# Altium PCB Pioneer.PcbDoc
Units mil, origin at the board's own origin, x right, y up, seen from the top; angles counter-clockwise.
Board outline 3000 x 2490 mil, 2 copper layers (Top Layer, Bottom Layer); 15 components, 21 nets, 99 pads, 2 vias.
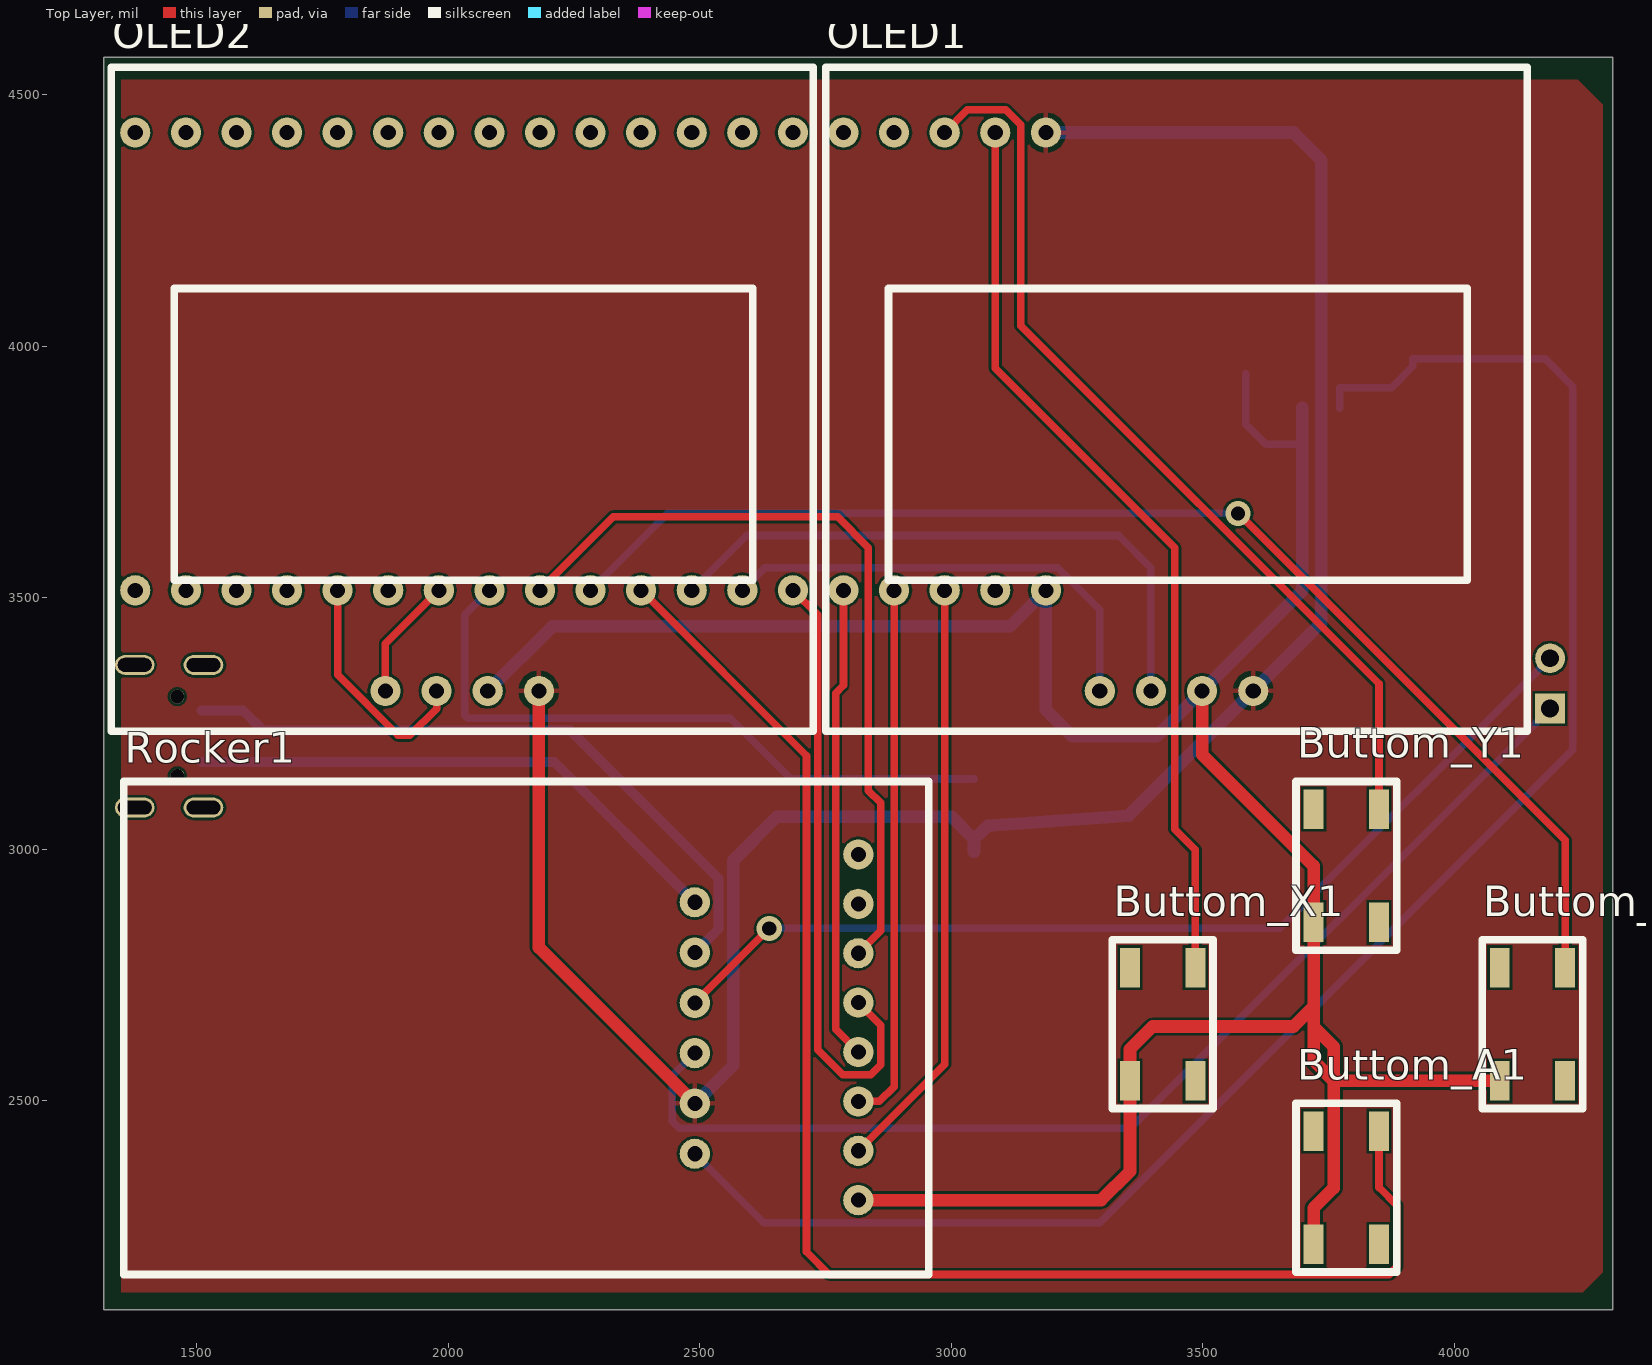
[diagram p0: Top Layer view]
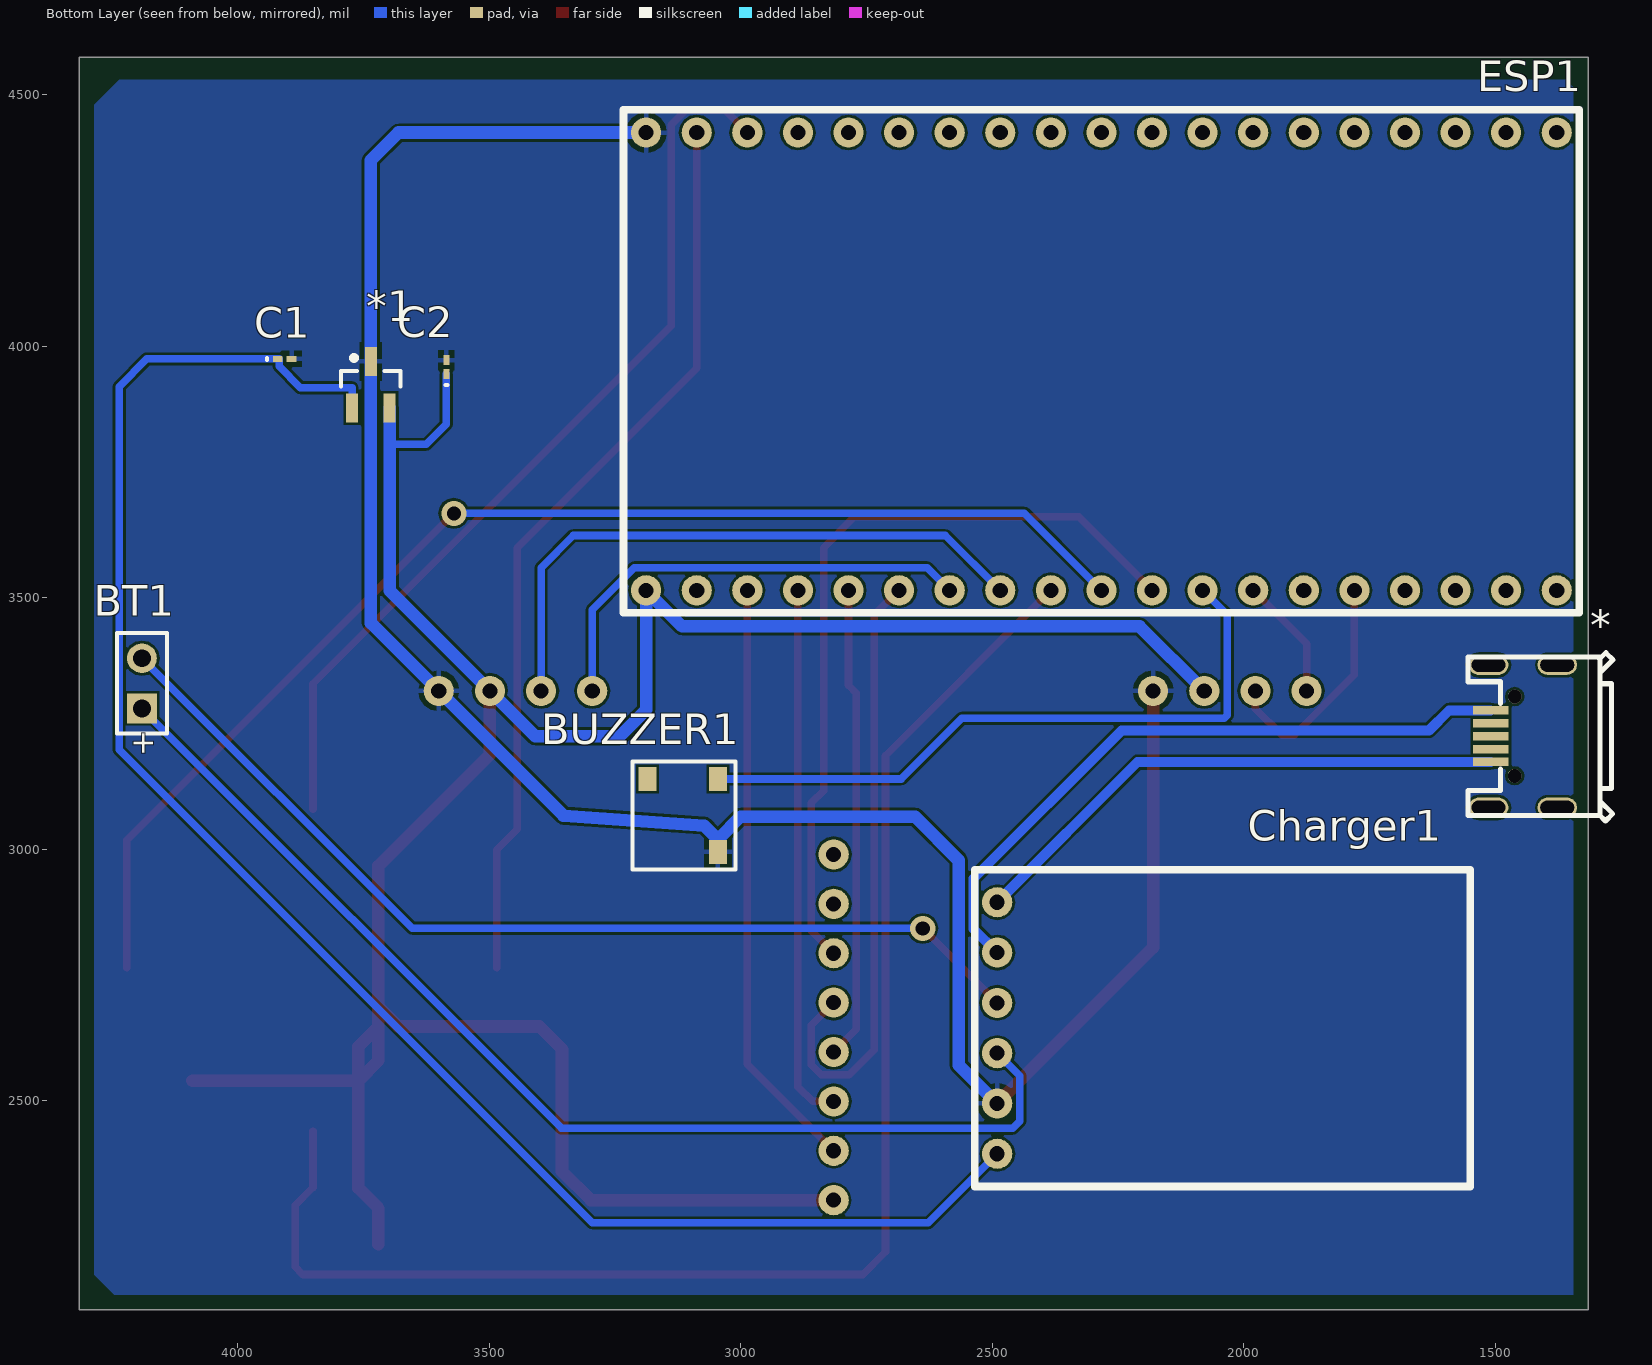
[diagram p1: Bottom Layer view, seen from below]

## Layer stack, top to bottom
Top Solder: solder mask 0.4, Solder Resist, Dk 3.5
Top Layer: signal copper 1.4
Dielectric 1: dielectric 12.6, FR-4, Dk 4.8
Bottom Layer: signal copper 1.4
Bottom Solder: solder mask 0.4, Solder Resist, Dk 3.5

## Board outline
1315,2085 4315,2085 4315,2145 4315,4575 1315,4575

## Design rules (kind name [scope] priority, off if disabled: settings)
Clearance [All] p1: gap=5 ignorepadtopadclearanceinfootprint=FALSE
PolygonConnect [All] p1: connectstyle=Relief reliefconductorwidth=10 reliefentries=4 polygonreliefangle="90 Angle" airgapwidth=10
RoutingVias [All] p1: holewidth=28 width=50 viastyle="Through Hole" minholewidth=28 minwidth=50 maxholewidth=28 maxwidth=50
SolderMaskExpansion [All] p1: expansion=4
Width "VCC IN" [InNet('VCC microusb')] p1: maxlimit=25 minlimit=15 preferedwidth=20
Width "GND IN" [InNet('GND microusb')] p2: maxlimit=25 minlimit=15 preferedwidth=20
Width VCC [InNet('VCC')] p3: maxlimit=30 minlimit=15 preferedwidth=25
Width GND [InNet('GND')] p4: maxlimit=30 minlimit=15 preferedwidth=25
Width [All] p5: maxlimit=20 minlimit=12 preferedwidth=15
30 further rules are at their usual default settings.

## Components (designator, comment, footprint, x,y, rotation, side; value= is the part's Value field where it differs from the comment)
* "Micro_usb" Micro_usb 1395,3220 r180 bottom
*1 "DC3.3" SOT23_M 3735,3923.74 r90 bottom
BT1 "Battery" BAT-2 4190,3330 r90 bottom
Buttom_A1 "Buttom" Buttom 3760,2425 r90 top
Buttom_B1 "Buttom" Buttom 4130,2750 r90 top
Buttom_X1 "Buttom" Buttom 3395,2750 r90 top
Buttom_Y1 "Buttom" Buttom 3760,3065 r90 top
BUZZER1 "Buzzer" Buzzer 3165,3060 r90 bottom
C1 "Cap" 0603 3906.22,3975 r180 bottom value=22uf
C2 "Cap" 0603 3585,3958.78 r90 bottom value=1uf
Charger1 "Charger" charge 2340,2840 r180 bottom
ESP1 "NodeMCU-32" NodeMCU-32 2622.78,4015 r90 bottom
OLED1 "OLED" OLED 3760,3420 r180 top
OLED2 "OLED" OLED 2340,3420 r180 top
Rocker1 "Rocker" rocker 2175,2625 r180 top

## Footprints (in the part's own frame and the unit in brackets; to place one, negate y for a bottom-side part, rotate by r counter-clockwise, add the part's x,y. Pads: shape width x height; smd on the part's side, far side on the other; paste and mask are expansions set on the pad)
0603 [mm] "Chip Inductor, Body 0.6x0.3mm, IPC High Density"
  rect 0.5x0.3 smd: 1(-0.35,0) 2(0.35,0)
  silkscreen extent -0.9,-0.05 -0.9,0.05, body extent -0.33,-0.18 0.33,0.18, height 0.55
BAT-2 [mm] "Battery; 2 Leads"
  rect 1.5x1.5 hole 0.9: 1(-1.27,0)
  round 1.5 hole 0.9: 2(1.27,0)
  silkscreen extent -2.54,-1.27 2.54,1.27
Buttom [mil]
  rect 78.74x39.37 smd: 1(-210,40) 2(-210,-90) 3(15,40) 4(15,-90)
  silkscreen extent -265,-125 70,75
Buzzer [mil]
  rect 47.24x35.43 smd: 1(80,-120) 2(-65,-120) 3(80,20)
  silkscreen extent -100,-155 115,50
charge [mil]
  round 60 hole 30: 1(-150,55) 2(-150,-45) 3(-150,-145) 4(-150,-245) 5(-150,-345) 6(-150,-445)
  silkscreen extent -195,-510 790,120
Micro_usb [mm]
  rect 1.8x0.43 smd: 1(-2.896,-1.173) 2(-2.896,-0.523) 3(-2.896,0.127) 4(-2.896,0.777) 5(-2.896,1.427)
  oval 2x1 hole 0.7 slot 1.7 at 0 deg: 6(-3.005,3.726) 7(0.465,3.727) 8(-3.005,-3.472) 9(0.465,-3.473)
  round 0.7 hole 0.7 unplated: ""(-1.685,-1.873) ""(-1.685,2.127)
  silkscreen extent -4.04,-4.15 3.28,4.35
NodeMCU-32 [mil] "esp32"
  round 60 hole 30: 1(-500,565) 2(-500,464.44) 3(-500,363.89) 4(-500,263.33) 5(-500,162.78) 6(-500,62.22) 7(-500,-38.33) 8(-500,-138.89) 9(-500,-239.44) 10(-500,-340) 11(-500,-440.56) 12(-500,-541.11) 13(-500,-641.67) 14(-500,-742.22) 15(-500,-842.78) 16(-500,-943.33) 17(-500,-1043.89) 18(-500,-1144.44) 19(-500,-1245) 20(410,565) 21(410,464.44) 22(410,363.89) 23(410,263.33) 24(410,162.78) 25(410,62.22) 26(410,-38.33) 27(410,-138.89) 28(410,-239.44) 29(410,-340) 30(410,-440.56) 31(410,-541.11) 32(410,-641.67) 33(410,-742.22) 34(410,-842.78) 35(410,-943.33) 36(410,-1043.89) 37(410,-1144.44) 38(410,-1245)
  silkscreen extent -545,-1290 455,610
OLED [mil]
  round 60 hole 30: 1(160,105) 2(261.67,105) 3(363.33,105) 4(465,105)
  silkscreen extent -385,-1135 1010,185
rocker [mil]
  round 60 hole 30: 1(-640,322.22) 2(-640,224.05) 3(-640,125.87) 4(-640,27.7) 5(-640,-70.48) 6(-640,-168.65) 7(-640,-266.83) 8(-640,-365)
  silkscreen extent -780,-510 820,470
SOT23_M [mm] "SOT23, 3-Leads, Body 2.9x1.3mm, Pitch 0.95mm, Lead Span 2.3mm - Reverse Pinning, IPC Low Density"
  rect 1.45x0.6 smd: 1(1.175,0) 2(-1.175,-0.95) 3(-1.175,0.95)
  silkscreen extent -0.1,-1.5 1.47,1.5, body extent -0.7,-1.5 0.7,1.5, height 1.1

## Part data
BT1: "Multicell Battery", LatestRevisionDate=17-Jul-2002, LatestRevisionNote="Re-released for DXP Platform.", PackageDescription="Battery; 2 Leads", PackageReference=BAT-2, Published=24-Mar-1999, Publisher="Altium Limited"
BUZZER1: "Magnetic Transducer Buzzer", ComponentLink1Description="Manufacturer Link", ComponentLink1URL=http://www.megastar.com/linecard/buzzmode/index.php, DatasheetVersion=17-Dec-2003, LatestRevisionDate=17-Dec-2003, LatestRevisionNote="Schematic revised, PCB Footprint replaced.", PackageDescription="Magnetic Transducer Buzzer", PackageReference=ABSM-1574, Published=24-Mar-1999, Publisher="Altium Limited"
C1 C2: "Capacitor", LatestRevisionDate=17-Jul-2002, LatestRevisionNote="Re-released for DXP Platform.", PackageDescription="Radial Cap, Thru-Hole; 2 Leads; 0.3 in Pin Spacing", PackageReference=RAD-0.3, Published=8-Jun-2000, Publisher="Altium Limited"

## Via types
v1: diameter 50, hole 28, Top Layer to Bottom Layer, 2 vias

## Nets (pads, with @x,y where several pads share a name; then routed paths per layer and width w, separated by ;. In a path a pad name is that pad's centre, name@x,y a point inside that pad or via, vN(x,y) a via of type N, cw(c..) or ccw(c..) an arc to the next point about the centre after c; other vN are vias at no path point)
Buttom_A_IO: Buttom_A1.4 ESP1.9 | length 2933.5
  Top Layer w15: ESP1.9 2712,3186.33 2712,2200 2757,2155 3870,2155 3885,2170 3885,2293 3850,2328 Buttom_A1.4
Buttom_B_IO: Buttom_B1.4 ESP1.10 | length 2522.8
  Top Layer w15: v1(3570,3668) 4220,3018 Buttom_B1.4
  Bottom Layer w15: ESP1.10 2435.78,3668 v1(3570,3668)
Buttom_X_IO: Buttom_X1.4 ESP1.21 | length 1824.8
  Top Layer w15: ESP1.21 3087.22,3956.78 3444,3600 3444,3040 3485,2999 Buttom_X1.4
Buttom_Y_IO: Buttom_Y1.4 ESP1.22 | length 1837.3
  Top Layer w15: ESP1.22 3031.67,4470 3108,4470 3138,4440 3138,4041 3850,3329 Buttom_Y1.4
"Buzzer IO": BUZZER1.1 ESP1.12 | length 1332.8
  Bottom Layer w15: ESP1.12 2033,3466.33 2033,3267 2039,3261 2560,3261 2681,3140 BUZZER1.1
GND: *1.1 BUZZER1.2 C1.2 C2.2 Charger1.5 ESP1.20 OLED1.1 OLED2.1 | length 4372.1
  Top Layer w25: OLED2.1 2180,2805 Charger1.5
  Bottom Layer w25: Charger1.5 2566.5,2571.5 2566.5,2978.5 2653,3065 3000,3065 3045,3020 ; BUZZER1.2 3045,3020 ; ESP1.20 3680,4425 3735,4370 *1.1 3735,3450 OLED1.1 3352,3067 3072,3047 3045,3020
"GND microusb": *.5 Charger1.2 | length 1332.9
  Bottom Layer w20: *.5 1591.8,3276.2 1632,3236 2243,3236 2537,2942 2537,2842 Charger1.2
Net*1_3: *1.3 C1.1 Charger1.6 | length 3471.4
  Bottom Layer w15: Charger1.6 2627,2258 3295,2258 4235,3198 4235,3920 4180,3975 C1.1 3917,3975 3917,3960 3875,3918 3772.4,3918 *1.3
NetBT1_1: BT1.1 Charger1.4 | length 2249.9
  Bottom Layer w15: Charger1.4 2445,2550 2445,2460 2459,2446 3356,2446 BT1.1
NetBT1_2: BT1.2 Charger1.3 | length 1983.7
  Top Layer w15: Charger1.3 v1(2638,2843)
  Bottom Layer w15: v1(2638,2843) 3653,2843 BT1.2
OLED1_SCL: ESP1.8 OLED1.3 | length 1229.4
  Bottom Layer w15: ESP1.8 2592.89,3624 3332.67,3624 3396.67,3560 OLED1.3
OLED1_SDA: ESP1.7 OLED1.4 | length 925
  Bottom Layer w15: ESP1.7 2629.44,3560 3211,3560 3295,3476 OLED1.4
OLED2_SCL: ESP1.15 OLED2.3 | length 471.3
  Top Layer w15: ESP1.15 1780,3347 1900,3227 1923.67,3227 1976.67,3280 OLED2.3
OLED2_SDA: ESP1.13 OLED2.4 | length 244
  Top Layer w15: OLED2.4 1875,3408.89 ESP1.13
Rocker_DWN_IO: ESP1.4 Rocker1.3 | length 1070
  Top Layer w15: Rocker1.3 2857.05,2499.13 2886.11,2528.19 ESP1.4
Rocker_LFT_IO: ESP1.5 Rocker1.4 | length 942.8
  Top Layer w15: ESP1.5 2785.56,3326 2770,3310.44 2770,2642.3 Rocker1.4
Rocker_MID_IO: ESP1.11 Rocker1.6 | length 1573.4
  Top Layer w15: ESP1.11 2328.22,3661 2774,3661 2835,3600 2835,3117 2859.5,3092.5 2859.5,2838.15 Rocker1.6
Rocker_RHT_IO: ESP1.6 Rocker1.5 | length 1230.4
  Top Layer w15: ESP1.6 2734,3466 2734,2602 2784,2552 2840,2552 2860,2572 2860,2650.48 Rocker1.5
Rocker_UP_IO: ESP1.3 Rocker1.2 | length 1185.2
  Top Layer w15: Rocker1.2 2986.67,2572.62 ESP1.3
VCC: *1.2 Buttom_A1.1 Buttom_B1.1 Buttom_X1.1 Buttom_Y1.1 C2.1 ESP1.1 OLED1.2 OLED2.2 Rocker1.1 | length 5564.6
  Top Layer w25: Rocker1.1 3297.78,2302.78 3355,2360 Buttom_X1.1 3355,2603 3400,2648 3680,2648 3720,2688 ; OLED1.2 3498.33,3188.67 3720,2967 Buttom_Y1.1 3720,2688 ; Buttom_A1.1 3720,2287 3760,2327 3760,2540 ; Buttom_B1.1 3760,2540 ; 3720,2648 3720,2688 ; 3720,2648 3720,2580 3760,2540 ; 3720,2648 3760,2608 3760,2540
  Bottom Layer w15: C2.1 3585,3845 3625,3805 3695,3805 3697.6,3807.6 3700,3810
  Bottom Layer w25: OLED2.2 2206.83,3443.5 3116.28,3443.5 ESP1.1 3187.78,3277.22 3240,3225 3408.33,3225 OLED1.2 3697.6,3514.26 3697.6,3807.6 *1.2
"VCC microusb": *.1 Charger1.1 | length 1096.5
  Bottom Layer w20: *.1 2211.2,3173.8 Charger1.1
pads on no net: *. *.2 *.3 *.4 *.6 *.7 *.8 *.9 Buttom_A1.2 Buttom_A1.3 Buttom_B1.2 Buttom_B1.3 Buttom_X1.2 Buttom_X1.3 Buttom_Y1.2 Buttom_Y1.3 BUZZER1.3 ESP1.2 ESP1.14 ESP1.16 ESP1.17 ESP1.18 ESP1.19 ESP1.23 ESP1.24 ESP1.25 ESP1.26 ESP1.27 ESP1.28 ESP1.29 ESP1.30 ESP1.31 ESP1.32 ESP1.33 ESP1.34 ESP1.35 ESP1.36 ESP1.37 ESP1.38 Rocker1.7 Rocker1.8

## Polygon pours and split planes (outlines as drawn)
GND on Bottom Layer "Bottom Layer-GND" (solid, pour order 18): 1355,4530 4235,4530 4285,4480 4285,2155 4245,2115 1345,2115 1345,4515 1375,4545
GND on Top Layer "Top Layer-GND" (solid, pour order 22): 1350,4530 4245,4530 4295,4480 4295,2160 4255,2120 1350,2120

## Text inside footprints (layer, text, board x,y; h text height)
BT1: Bottom Overlay "+" at 4167.28,3185.51 h45.28 r270